# Altium PCB INS_Visualizer.PcbDoc
Units mm, origin at the board's own origin, x right, y up, seen from the top; angles counter-clockwise.
Board outline 99.82 x 69.85 mm, 2 copper layers (Top Layer, Bottom Layer); 20 components, 13 nets, 104 pads, 0 vias.
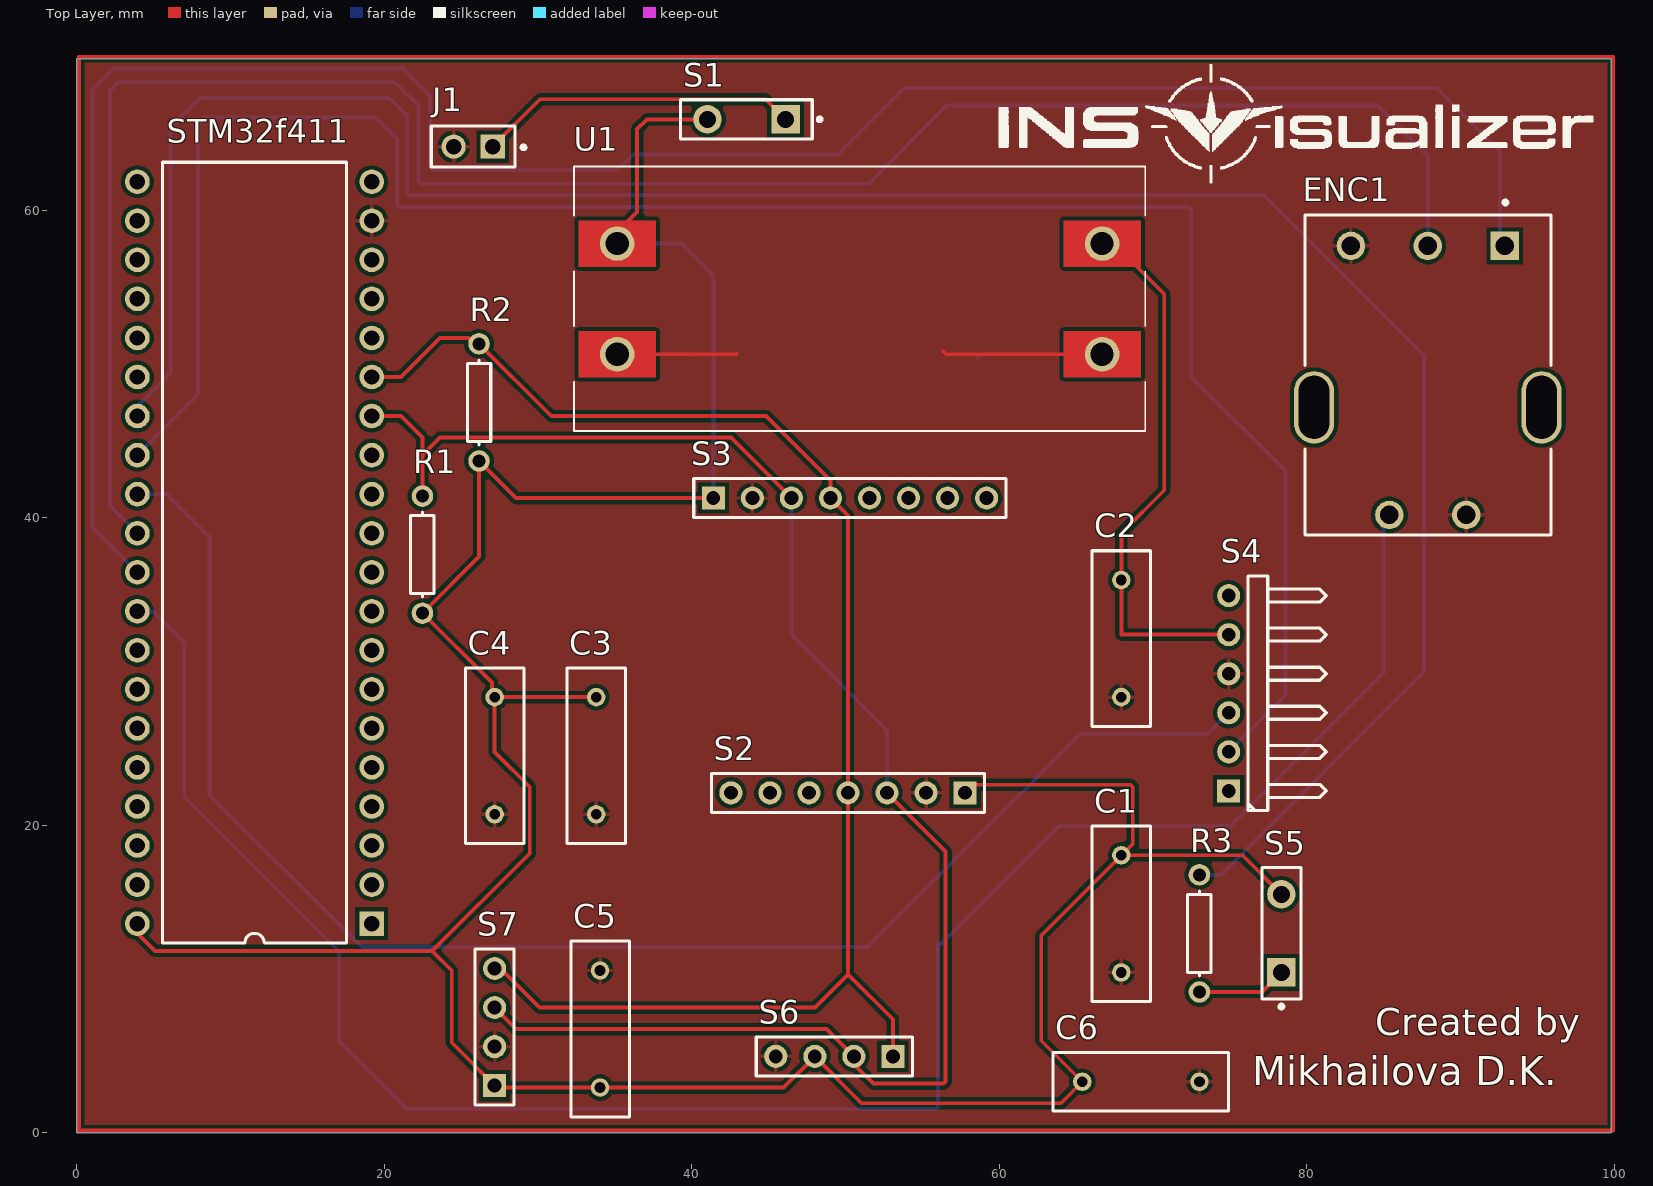
[diagram p0: Top Layer view]
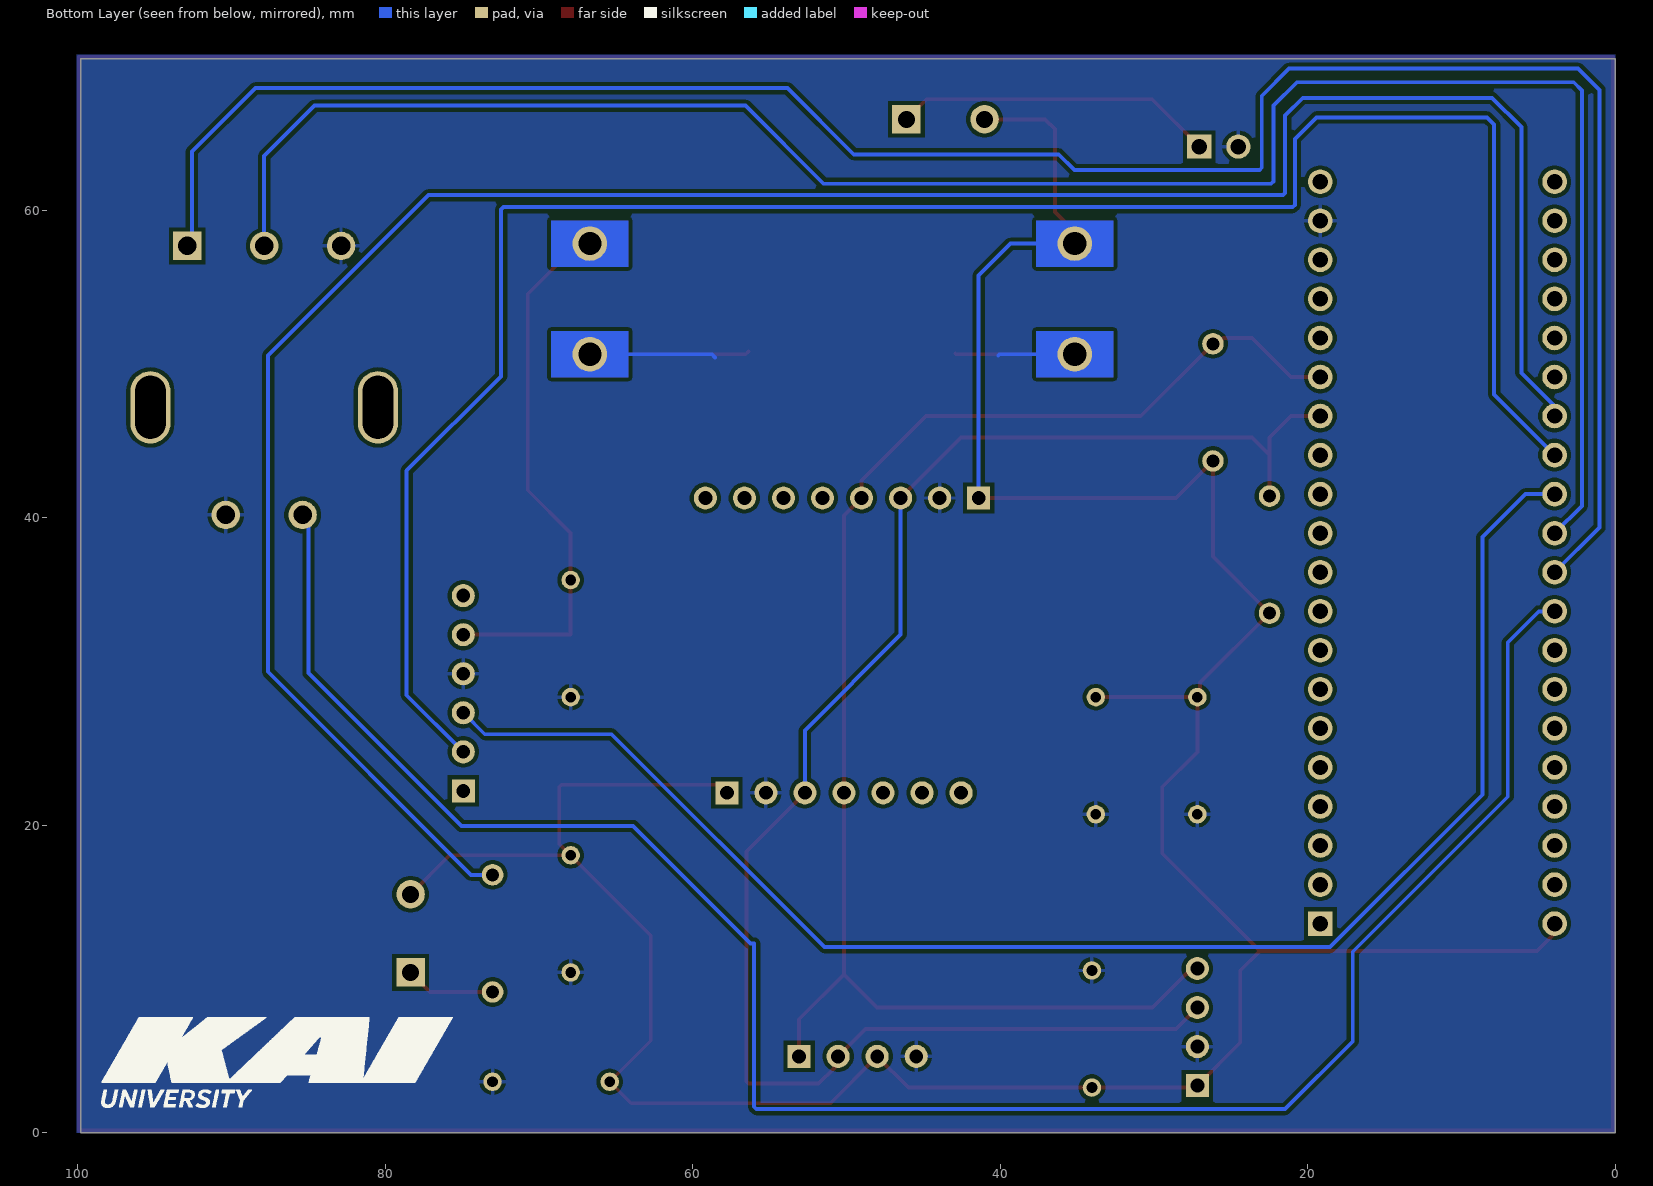
[diagram p1: Bottom Layer view, seen from below]

## Layer stack, top to bottom
Top Solder: solder mask 0.0102, Solder Resist, Dk 3.5
Top Layer: signal copper 0.0356
Dielectric 1: dielectric 0.32, FR-4, Dk 4.8
Bottom Layer: signal copper 0.0356
Bottom Solder: solder mask 0.0102, Solder Resist, Dk 3.5

## Board outline
0,0 0,69.85 99.822,69.85 99.822,0

## Design rules (kind name [scope] priority, off if disabled: settings)
Clearance [All] p1: gap=0.254 ignorepadtopadclearanceinfootprint=FALSE
PolygonConnect [All] p1: connectstyle=Relief reliefconductorwidth=0.254 reliefentries=4 polygonreliefangle="90 Angle" airgapwidth=0.254
RoutingVias [All] p1: holewidth=0.711 width=1.27 viastyle="Through Hole" minholewidth=0.711 minwidth=1.27 maxholewidth=0.711 maxwidth=1.27
SolderMaskExpansion [All] p1: expansion=0 istentingtop=FALSE
SupplyNets "Schematic Supply Nets_2" [InNet('+5')] p1: voltage=0.000
SupplyNets "Schematic Supply Nets_1" [InNet('GND')] p2: voltage=0.000
SupplyNets "Schematic Supply Nets" [InNet('VCC')] p3: voltage=0.000
Width [All] p1: maxlimit=0.254 minlimit=0.254 preferedwidth=0.254
30 further rules are at their usual default settings.

## Classes and differential pairs
component class INS_Visualizer: C1 C2 C3 C4 C5 C6 ENC1 J1 R1 R2 R3 S1 S2 S3 S4 S6 S7

## Components (designator, comment, footprint, x,y, rotation, side; value= is the part's Value field where it differs from the comment)
C1 "Capacitor" RAD-0.3 67.945,14.224 r90 top value=100nF
C2 "Capacitor" RAD-0.3 67.945,32.131 r90 top value=100nF
C3 "Capacitor" RAD-0.3 33.782,24.511 r90 top value=100nF
C4 "Capacitor" RAD-0.3 27.178,24.511 r90 top value=100nF
C5 "Capacitor" RAD-0.3 34.036,6.731 r270 top value=100nF
C6 "Capacitor" RAD-0.3 69.215,3.302 r180 top value=100nF
ENC1 "PEC16-4115F-S0012" FP-PEC16-4115F-S0012-MFG 87.884,49.276 r180 top
J1 "TSW-102-22-G-S" FP-TSW-102-22-G-S-MFG 25.781,64.135 r180 top
R1 "Resistor" AXIAL-0.3 22.479,37.592 r270 top value=1K
R2 "Resistor" AXIAL-0.3 26.162,47.498 r270 top value=1K
R3 "Resistor" AXIAL-0.3 73.025,12.954 r90 top value=1K
S1 "SW-SPST" SPST-2 43.561,65.913 r180 top
S2 "MCU-9911" MCU_9911_HDR1x7 57.776,22.064 r180 top
S3 "MPU_6050" MPU6050_HDR1X8 41.402,41.275 r0 top
S4 "HC-05" HC-05_HDR1x6H 74.93,22.225 r90 top
S5 "SW-PB" SPST-2 78.359,12.954 r90 top
S6 "OLED_I2C_128*64" OLED_HDR1x4 53.086,4.953 r180 top
S7 "BMP580" BMP580_HDR1x4 27.178,3.048 r90 top
STM32f411 "STM32_BlackPillf411" STM32_HDR2x20 19.177,13.589 r180 top (schematic designator U2)
U1 "MT3608" MT3608 50.927,54.229 r0 top

## Footprints (in the part's own frame and the unit in brackets; to place one, negate y for a bottom-side part, rotate by r counter-clockwise, add the part's x,y. Pads: shape width x height; smd on the part's side, far side on the other; paste and mask are expansions set on the pad)
AXIAL-0.3 [mm] "Axial Device, Thru-Hole; 2 Leads; 0.3 in Pin Spacing"
  round 1.4 hole 0.85: 1(-3.81,0) 2(3.81,0)
  silkscreen extent -2.77,-0.76 2.77,0.76
BMP580_HDR1x4 [mm]
  rect 1.5x1.5 hole 0.9: 1(0,0)
  round 1.5 hole 0.9: 2(2.54,0) 3(5.08,0) 4(7.62,0)
  silkscreen extent -1.27,-1.27 8.89,1.27, body extent -1.27,-1.27 8.89,1.27, height 8.89
FP-PEC16-4115F-S0012-MFG [mm]
  rrect100% 2.6x4.7 hole 4.1 slot 2 at 0 deg paste-2539.97 mask+0: 1(-7.4,2.1) 2(7.4,2.1)
  rect 1.85x1.85 hole 1.2 paste-2539.97 mask+0: A(-5,-8.4)
  round 1.85 hole 1.2 paste-2539.97 mask+0: B(0,-8.4) C(5,-8.4) D(-2.5,9.1) E(2.5,9.1)
  silkscreen extent -8,-11.35 8,10.4, body extent -8.8,-10.5 8.8,10.5, height 0.25
FP-TSW-102-22-G-S-MFG [mm]
  rect 1.57x1.57 hole 1.02 paste-2539.97 mask+0: 1(-1.27,0)
  round 1.57 hole 1.02 paste-2539.97 mask+0: 2(1.27,0)
  silkscreen extent -3.4,-1.34 2.73,1.34, body extent -2.83,-1.44 2.83,1.44, height 0.25
HC-05_HDR1x6H [mm]
  rect 1.5x1.5 hole 0.9: 1(0,0)
  round 1.5 hole 0.9: 2(2.54,0) 3(5.08,0) 4(7.62,0) 5(10.16,0) 6(12.7,0)
  silkscreen extent -1.27,-6.35 13.97,-1.27, body extent -1.27,-10.22 13.97,0.13, height 2.55
MCU_9911_HDR1x7 [mm]
  rect 1.5x1.5 hole 0.9: 1(-0.009,-0.034)
  round 1.5 hole 0.9: 2(2.531,-0.034) 3(5.071,-0.034) 4(7.611,-0.034) 5(10.151,-0.034) 6(12.691,-0.034) 7(15.231,-0.034)
  silkscreen extent -1.28,-1.3 16.5,1.24
MPU6050_HDR1X8 [mm] "Connector; Header; 8 Position"
  rect 1.5x1.5 hole 0.9: 1(0,0)
  round 1.5 hole 0.9: 2(2.54,0) 3(5.08,0) 4(7.62,0) 5(10.16,0) 6(12.7,0) 7(15.24,0) 8(17.78,0)
  silkscreen extent -1.27,-1.27 19.05,1.27, body extent -1.66,-14.6 19.44,1.27, height 6.07
MT3608 [mm] "DC-DC"
  round 2.25 hole 1.5 mask+0: 1(-15.775,3.6) 2(-15.775,-3.6) 3(15.775,3.6) 4(15.775,-3.6)
  Top Layer region: -13.275,2.1 -18.275,2.1 -18.275,5.1 -13.275,5.1
  Top Layer region: 18.275,2.1 13.275,2.1 13.275,5.1 18.275,5.1
  Top Layer region: 18.275,-5.1 13.275,-5.1 13.275,-2.1 18.275,-2.1
  Top Layer region: -13.275,-5.1 -18.275,-5.1 -18.275,-2.1 -13.275,-2.1
  Bottom Layer region: -13.275,2.1 -18.275,2.1 -18.275,5.1 -13.275,5.1
  Bottom Layer region: 18.275,2.1 13.275,2.1 13.275,5.1 18.275,5.1
  Bottom Layer region: 18.275,-5.1 13.275,-5.1 13.275,-2.1 18.275,-2.1
  Bottom Layer region: -13.275,-5.1 -18.275,-5.1 -18.275,-2.1 -13.275,-2.1
  silkscreen extent -18.57,-8.6 18.57,8.6, body extent -18.57,-8.83 18.58,8.6, height 6.45
OLED_HDR1x4 [mm]
  rect 1.5x1.5 hole 0.9: 1(0,0)
  round 1.5 hole 0.9: 2(2.54,0) 3(5.08,0) 4(7.62,0)
  silkscreen extent -1.27,-1.27 8.89,1.27, body extent -1.27,-1.27 8.89,1.27, height 8.89
RAD-0.3 [mm] "Radial Cap, Thru-Hole; 2 Leads; 0.3 in Pin Spacing"
  round 1.2 hole 0.7: 1(-3.81,0) 2(3.81,0)
  silkscreen extent -5.71,-1.91 5.71,1.91
SPST-2 [mm] "Switch; 2 Leads"
  rect 1.85x1.85 hole 1.1: 1(-2.54,0)
  round 1.85 hole 1.1: 2(2.54,0)
  silkscreen extent -4.89,-1.27 4.28,1.27
STM32_HDR2x20 [mm]
  rect 1.6x1.6 hole 1: 1(0,0)
  round 1.6 hole 1: 2(0,-2.54) 3(0,-5.08) 4(0,-7.62) 5(0,-10.16) 6(0,-12.7) 7(0,-15.24) 8(0,-17.78) 9(0,-20.32) 10(0,-22.86) 11(0,-25.4) 12(0,-27.94) 13(0,-30.48) 14(0,-33.02) 15(0,-35.56) 16(0,-38.1) 17(0,-40.64) 18(0,-43.18) 19(0,-45.72) 20(0,-48.26) 21(15.24,-48.26) 22(15.24,-45.72) 23(15.24,-43.18) 24(15.24,-40.64) 25(15.24,-38.1) 26(15.24,-35.56) 27(15.24,-33.02) 28(15.24,-30.48) 29(15.24,-27.94) 30(15.24,-25.4) 31(15.24,-22.86) 32(15.24,-20.32) 33(15.24,-17.78) 34(15.24,-15.24) 35(15.24,-12.7) 36(15.24,-10.16) 37(15.24,-7.62) 38(15.24,-5.08) 39(15.24,-2.54) 40(15.24,0)
  silkscreen extent 1.63,-49.53 13.61,1.27, body extent -1.25,-49.78 16.49,1.52, height 5

## Part data
ENC1: library part CMP-07421-000056-1, "ROTARY ENCODER MECHANICAL 12PPR", Max Operating Temperature=70°C, Min Operating Temperature=-30°C, Operating Supply Voltage=5V, Package Quantity=50, Built in Switch=Yes, Detent=Yes, Encoder Type=Mechanical, Height=17.3mm, Length=23mm, Mount="Through Hole", Number of Channels=2, Orientation=Vertical, Output Type=Quadrature, Pulses per Revolution=12, RoHS Compliant=Yes, Series=PEC16, Termination="PC Pin", Width=16mm
J1: library part CMP-02766-000117-1, "CONN HEADER VERT 2POS 2.54MM", Housing Color=Black, Max Current Rating=7.6A, Max Operating Temperature=125°C, Max Voltage Rating (AC)=550V, Min Operating Temperature=-55°C, Contact Material=Bronze, Contact Plating=Gold, Depth=2.54mm, Gender=Male, Housing Material=Polyester, Length=5.08mm, Number of Contacts=2, Number of Rows=1, Orientation=Straight, Packaging=Bulk, Pitch=2.54mm, Radiation Hardening=No, REACH SVHC="No SVHC", Termination=Solder
S1: "Single-Pole, Single-Throw Switch", LatestRevisionDate=17-Jul-2002, LatestRevisionNote="Re-released for DXP Platform.", PackageDescription="Switch; 2 Leads", PackageReference=SPST-2, Published=24-Mar-1999, Publisher="Altium Limited"
S5: "Switch", LatestRevisionDate=17-Jul-2002, LatestRevisionNote="Re-released for DXP Platform.", PackageDescription="Switch; 2 Leads", PackageReference=SPST-2, Published=24-Mar-1999, Publisher="Altium Limited"
C1 C2 C3 C4 C5 C6: LatestRevisionDate=17-Jul-2002, LatestRevisionNote="Re-released for DXP Platform.", PackageDescription="Radial Cap, Thru-Hole; 2 Leads; 0.3 in Pin Spacing", PackageReference=RAD-0.3, Published=8-Jun-2000, Publisher="Altium Limited"
R1 R2 R3: LatestRevisionDate=17-Jul-2002, LatestRevisionNote="Re-released for DXP Platform.", PackageDescription="Axial Device, Thru-Hole; 2 Leads; 0.3 in Pin Spacing", PackageReference=AXIAL-0.3, Published=8-Jun-2000, Publisher="Altium Limited"

## Nets (pads, with @x,y where several pads share a name; then routed paths per layer and width w, separated by ;. In a path a pad name is that pad's centre, name@x,y a point inside that pad or via, vN(x,y) a via of type N, cw(c..) or ccw(c..) an arc to the next point about the centre after c; other vN are vias at no path point)
+5: C2.2 S4.5 U1.3 | length 35.7
  Top Layer w0.254: U1.3 67.464,57.829 70.739,54.554 70.739,41.783 67.945,38.989 67.945,32.385 S4.5
GND: C1.1 C2.1 C3.1 C4.1 C5.1 C6.1 ENC1.C ENC1.D J1.2 S2.2 S3.2 S4.4 S6.4 S7.2 STM32f411.19 U1.2 U1.4 | length 31.8
  Top Layer w0.254: C3.1 C3.1@33.909,20.574 ; C5.1@33.909,10.668 C5.1 ; U1.2 42.882,50.629 42.926,50.673 ; 56.388,50.8 56.559,50.629 U1.4
  Bottom Layer w0.254: U1.2 40.049,50.629 40.132,50.546 ; 58.547,50.419 58.757,50.629 U1.4
NetENC1_A: ENC1.A STM32f411.31 | length 140.4
  Bottom Layer w0.254: STM32f411.31 1.016,39.37 1.016,67.818 2.413,69.215 21.209,69.215 22.987,67.437 22.987,62.76 23.136,62.611 35.179,62.611 36.195,63.627 49.53,63.627 53.848,67.945 88.457,67.945 92.583,63.819 92.583,57.977 ENC1.A
NetENC1_B: ENC1.B STM32f411.30 | length 130.4
  Bottom Layer w0.254: STM32f411.30 2.159,40.767 2.159,67.796 2.689,68.326 20.701,68.326 22.225,66.802 22.225,61.871 22.374,61.722 51.492,61.722 56.572,66.802 84.6,66.802 87.884,63.518 ENC1.B
NetENC1_E: ENC1.E STM32f411.32 | length 132
  Bottom Layer w0.254: STM32f411.32 3.953,33.893 4.969,33.893 6.985,31.877 6.985,21.844 17.069,11.76 17.069,5.918 21.463,1.524 55.858,1.524 56.007,1.673 56.007,12.297 56.239,12.297 63.881,19.939 75.037,19.939 85.003,29.905 ENC1.E@85.003,40.176
NetJ1_1: J1.1 S1.1 | length 20.9
  Top Layer w0.254: J1.1 30.135,67.219 44.795,67.219 S1.1
NetR1_1: R1.1 S2.3 S3.3 S6.2 S7.3 STM32f411.14 | length 107.7
  Top Layer w0.254: STM32f411.14 21.082,46.609 22.479,45.212 22.479,44.069 ; R1.1 22.479,44.069 ; S7.3 28.575,6.731 48.768,6.731 50.784,4.715 50.784,4.207 51.816,3.175 56.366,3.175 56.515,3.324 56.515,18.288 S2.3 ; S3.3 42.545,45.212 23.622,45.212 22.479,44.069
  Bottom Layer w0.254: S3.3 46.482,32.385 52.705,26.162 S2.3
NetR2_1: R2.1 S2.4 S3.4 S6.1 S7.4 STM32f411.15 | length 98.8
  Top Layer w0.254: STM32f411.15 21.082,49.149 23.622,51.689 25.471,51.689 25.852,51.308 R2.1 30.861,46.609 44.831,46.609 49.022,42.418 S3.4 50.165,40.132 S2.4 50.165,10.287 ; S7.4 27.515,10.668 27.87,10.313 27.914,10.313 30.099,8.128 48.006,8.128 50.165,10.287 ; S6.1 53.086,7.366 50.165,10.287
NetR3_1: R3.1 S5.1 | length 5.9
  Top Layer w0.254: R3.1 77.089,9.144 S5.1
NetR3_2: R3.2 STM32f411.27 | length 152.8
  Bottom Layer w0.254: STM32f411.27@3.302,46.609 6.096,49.403 6.096,65.405 8.001,67.31 20.32,67.31 21.463,66.167 21.463,61.129 21.612,60.98 77.196,60.98 87.63,50.546 87.63,29.972 74.422,16.764 R3.2
NetS4_2: S4.2 STM32f411.28 | length 132.3
  Bottom Layer w0.254: STM32f411.28 7.874,48.006 7.874,65.576 8.338,66.04 19.431,66.04 20.828,64.643 20.828,60.347 20.977,60.198 72.324,60.198 72.473,60.049 72.473,49.193 78.613,43.053 78.613,28.448 S4.2
NetS4_3: S4.3 STM32f411.29 | length 99.3
  Bottom Layer w0.254: STM32f411.29 5.842,41.529 8.636,38.735 8.636,21.971 18.542,12.065 51.435,12.065 65.278,25.908 73.533,25.908 S4.3
VCC: C1.2 C3.2 C4.2 C5.2 C6.2 R1.2 R2.2 S1.2 S2.1 S3.1 S5.2 S6.3 S7.1 STM32f411.40 U1.1 | length 212.9
  Top Layer w0.254: STM32f411.40@3.619,13.271 5.08,11.811 23.114,11.811 ; C3.2 C4.2 ; U1.1@34.771,58.21 36.449,59.888 36.449,65.278 37.084,65.913 S1.2 ; S3.1 28.575,41.275 R2.2 26.162,37.465 R1.2 26.997,29.264 26.997,28.502 C4.2 ; S2.1 58.313,22.626 68.539,22.626 68.687,22.477 68.687,18.776 C1.2 ; S5.2 75.819,18.034 C1.2 ; 23.114,11.811 29.464,18.161 29.464,22.479 27.178,24.765 C4.2 ; 23.114,11.811 24.384,10.541 24.384,5.842 S7.1 27.305,2.921 C5.2 45.974,2.921 S6.3 51.054,1.905 64.008,1.905 C6.2 62.738,5.969 62.738,12.827 C1.2
  Bottom Layer w0.254: U1.1 39.326,57.829 41.402,55.753 S3.1
pads on no net: ENC1.1 ENC1.2 S2.5 S2.6 S2.7 S3.5 S3.6 S3.7 S3.8 S4.1 S4.6 STM32f411.1 STM32f411.2 STM32f411.3 STM32f411.4 STM32f411.5 STM32f411.6 STM32f411.7 STM32f411.8 STM32f411.9 STM32f411.10 STM32f411.11 STM32f411.12 STM32f411.13 STM32f411.16 STM32f411.17 STM32f411.18 STM32f411.20 STM32f411.21 STM32f411.22 STM32f411.23 STM32f411.24 STM32f411.25 STM32f411.26 STM32f411.33 STM32f411.34 STM32f411.35 STM32f411.36 STM32f411.37 STM32f411.38 STM32f411.39
copper on no net: | length 339.3
  Top Layer w0.254: 0.127,0.127 99.949,0.127 99.949,69.977 0.127,69.977 0.127,0.127

## Polygon pours and split planes (outlines as drawn)
GND on Top Layer "GND" (solid, pour order 2): 0.127,69.977 99.949,69.977 99.949,0.127 0.127,0.127
GND on Bottom Layer "GND" (solid, pour order 3): 0,0 0,70.104 100.076,70.104 100.069,70.097 100.069,0

## Silkscreen, mask and mechanical layers (free items; w line width, h text height)
Top Overlay:
  drawing of 27 lines, arcs and shapes, not listed
  text "Created by" at 84.455,5.726 h3
  text "Mikhailova D.K." at 76.454,2.443 h3.2
Bottom Overlay:
  drawing of 11 lines, arcs and shapes, not listed

## Text inside footprints (layer, text, board x,y; h text height)
U1: Top 3D Body "VOUT_N" at 32.927,47.229 h1.27; Top 3D Body "VOUT_P" at 32.927,59.979 h1.27; Top 3D Body "VIN_N" at 63.927,47.229 h1.27; Top 3D Body "VIN_P" at 63.927,59.979 h1.27